# Altium PCB Connector.PcbDoc
Units mm, origin at the board's own origin, x right, y up, seen from the top; angles counter-clockwise.
Board outline 113.03 x 118.24 mm, 4 copper layers (Top Layer, Layer 1, Layer 2, Bottom Layer), stack 0.603 mm thick; 55 components, 258 nets, 298 pads, 108 vias.
Unrouted connection lines stored in the file: 2.
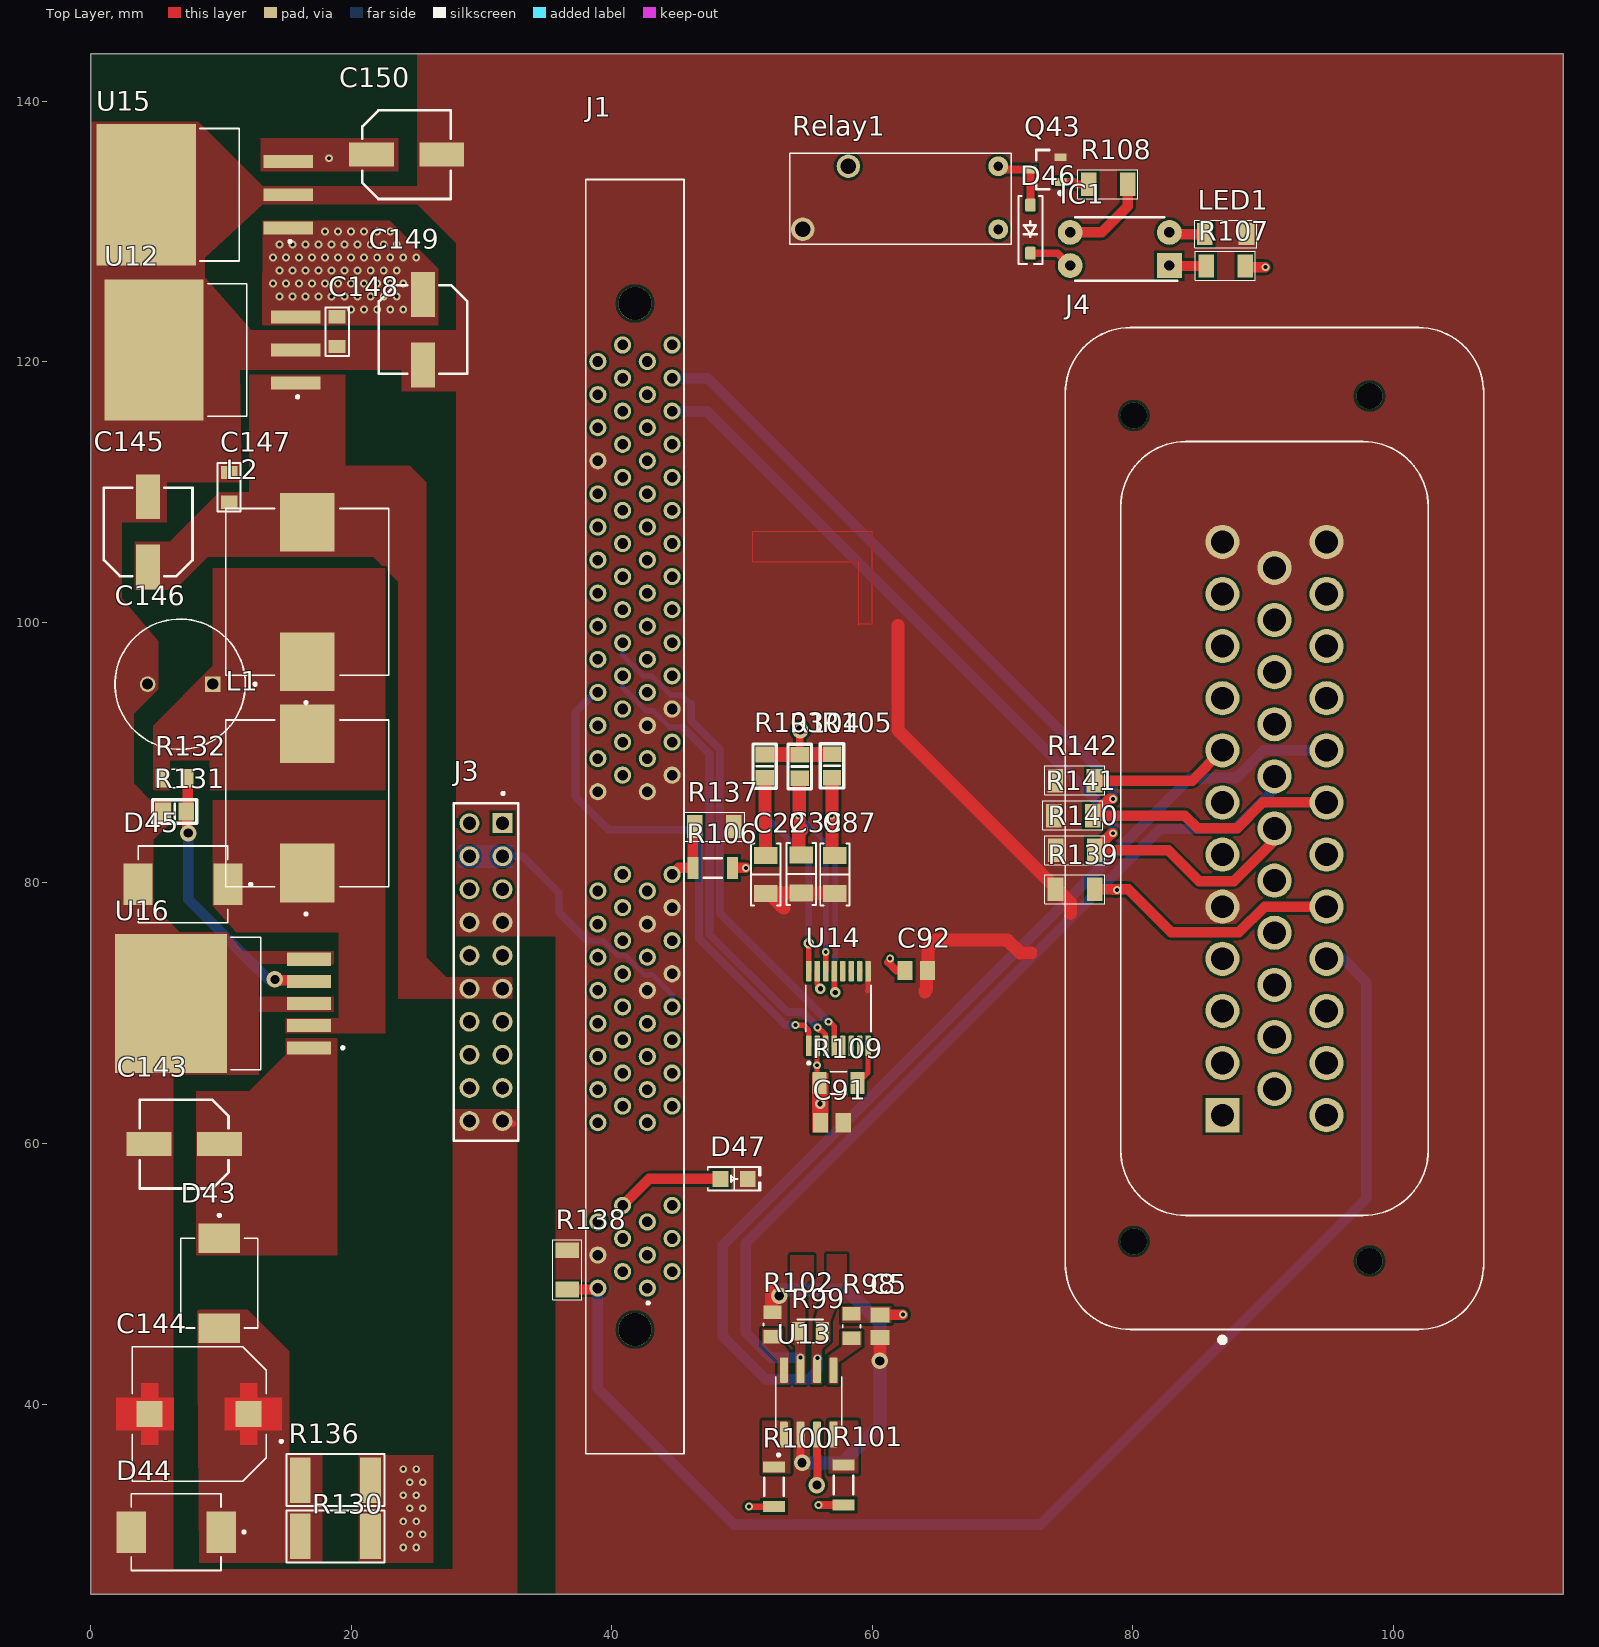
[diagram p0: Top Layer view]
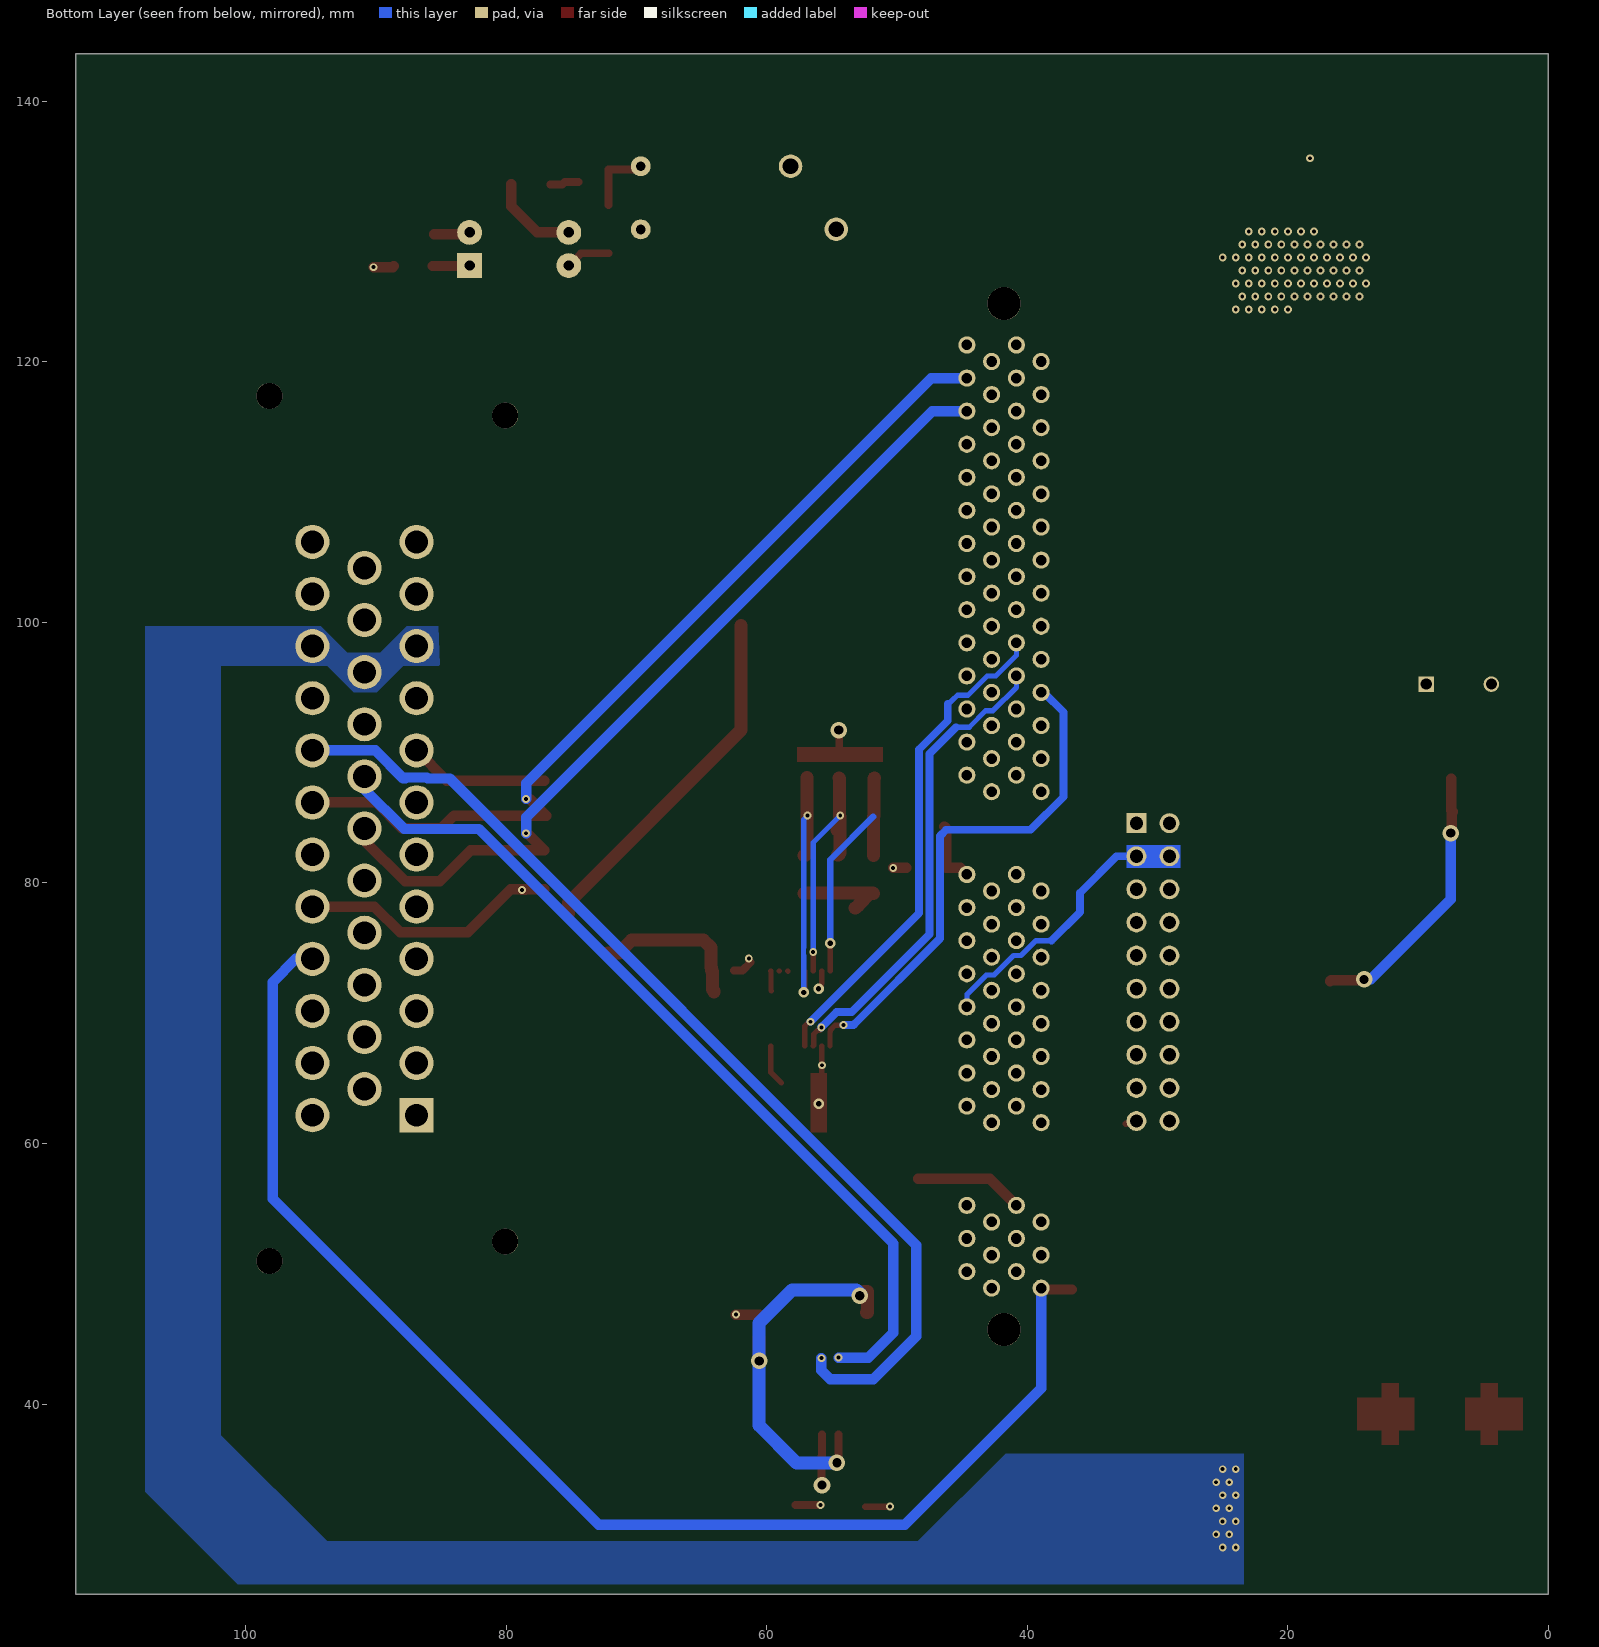
[diagram p1: Bottom Layer view, seen from below]
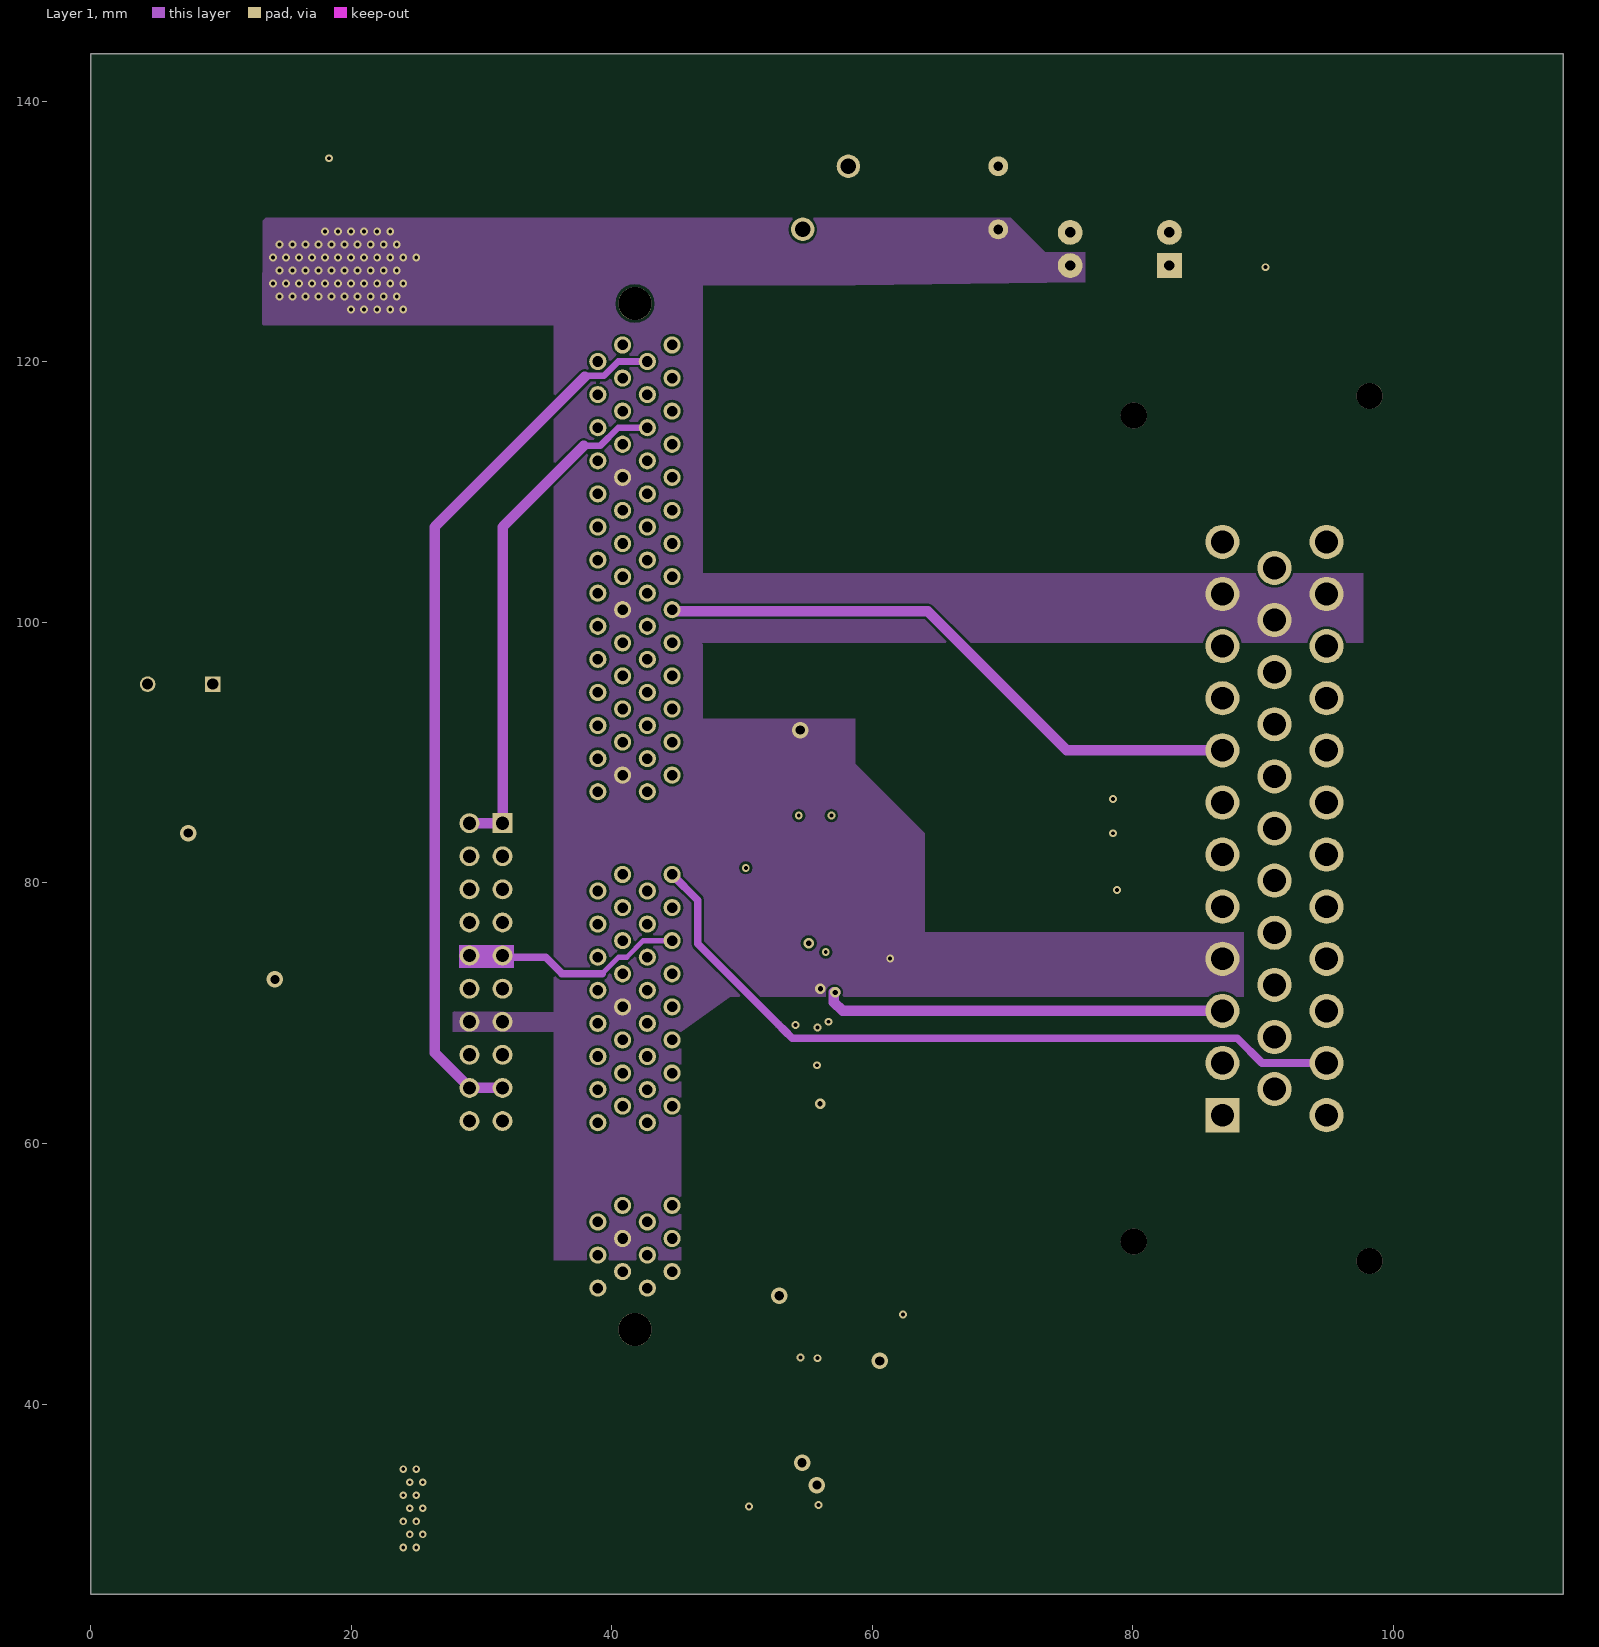
[diagram p2: Layer 1]
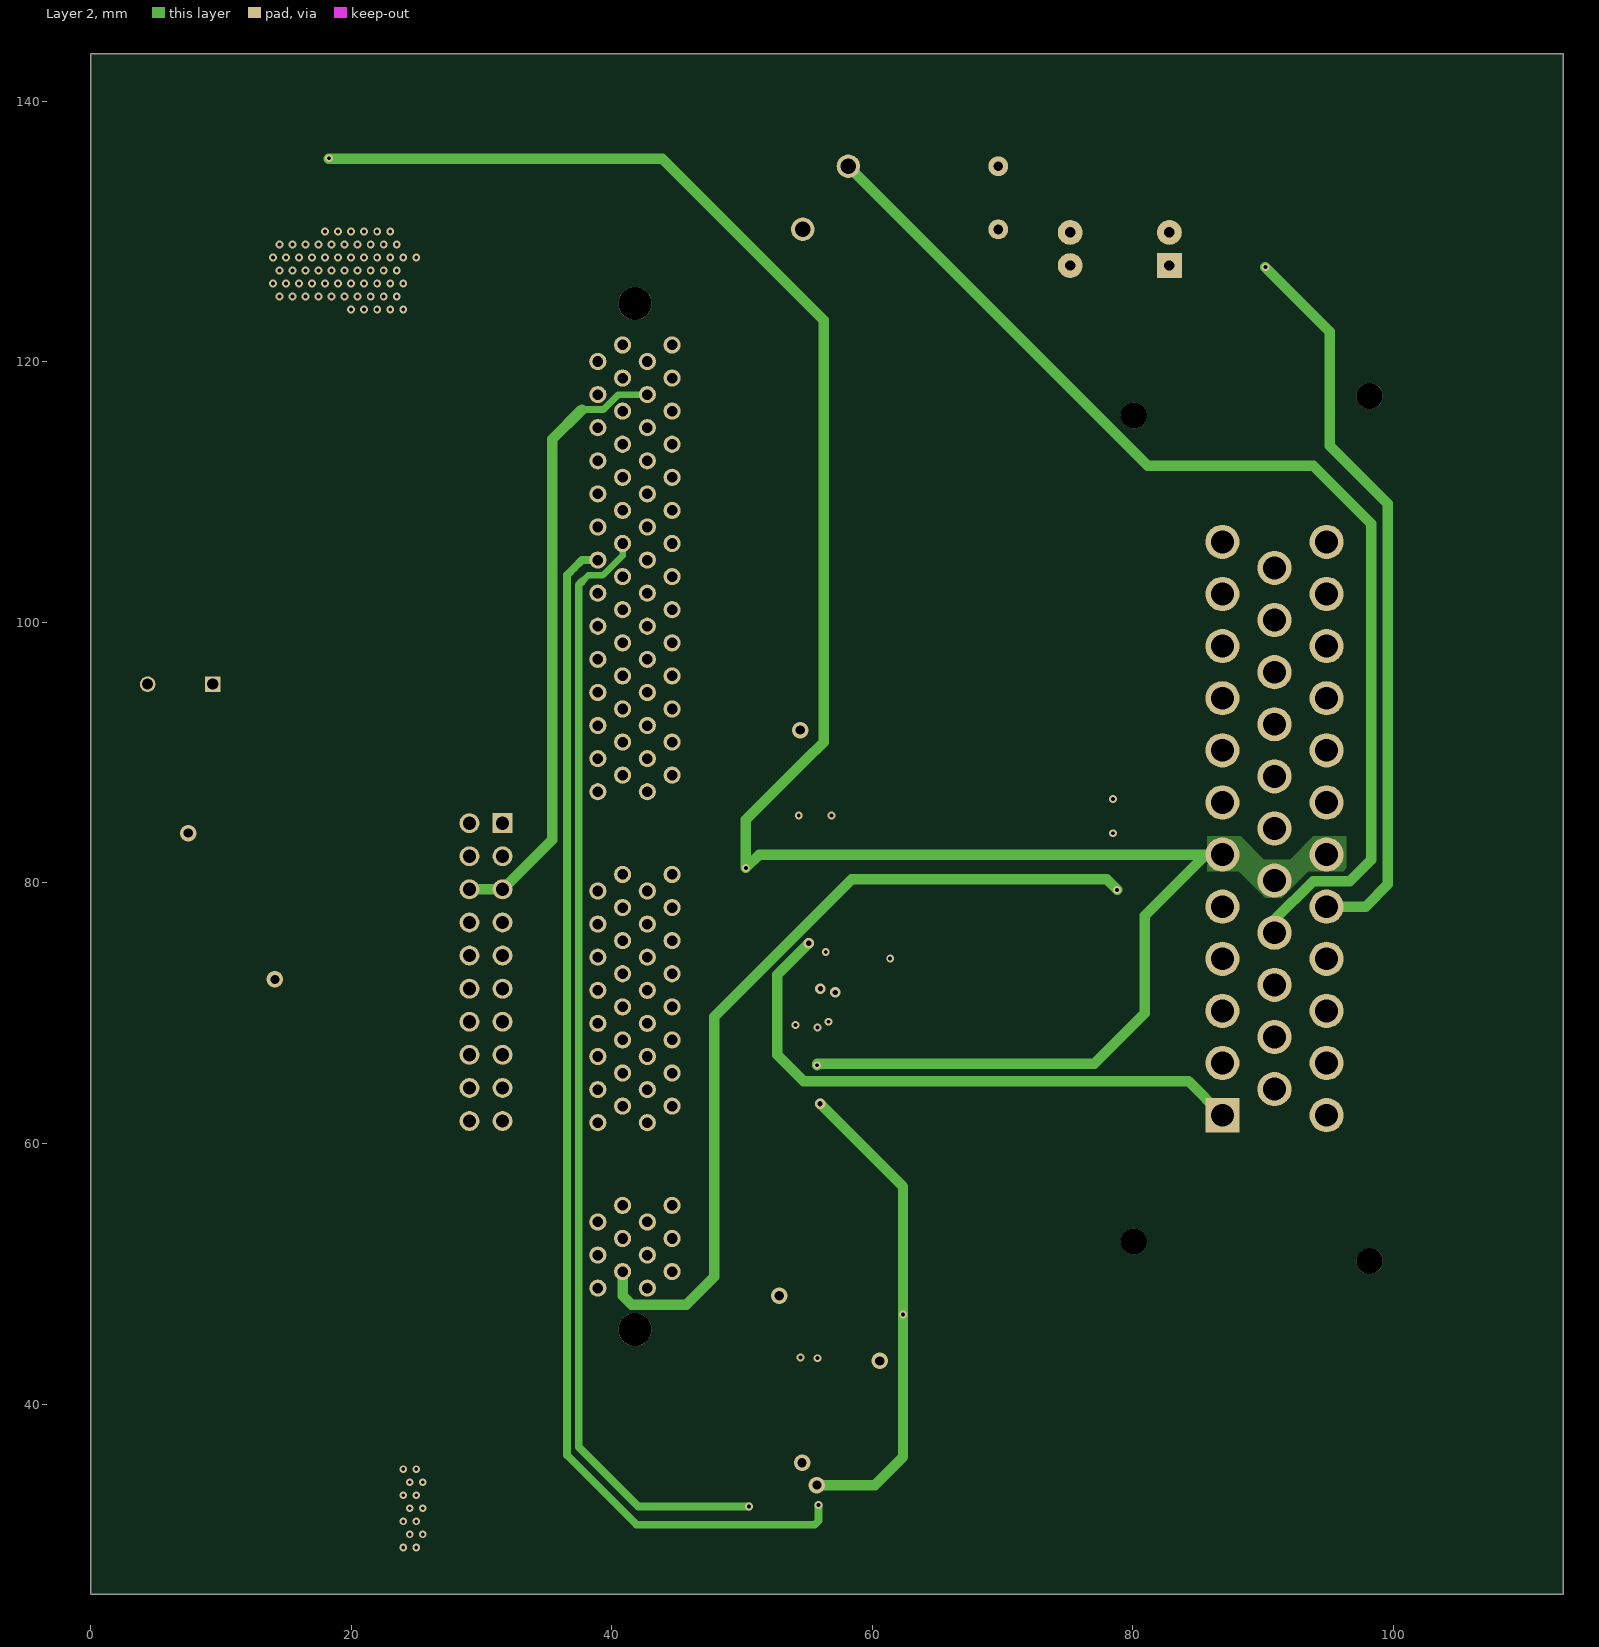
[diagram p3: Layer 2]
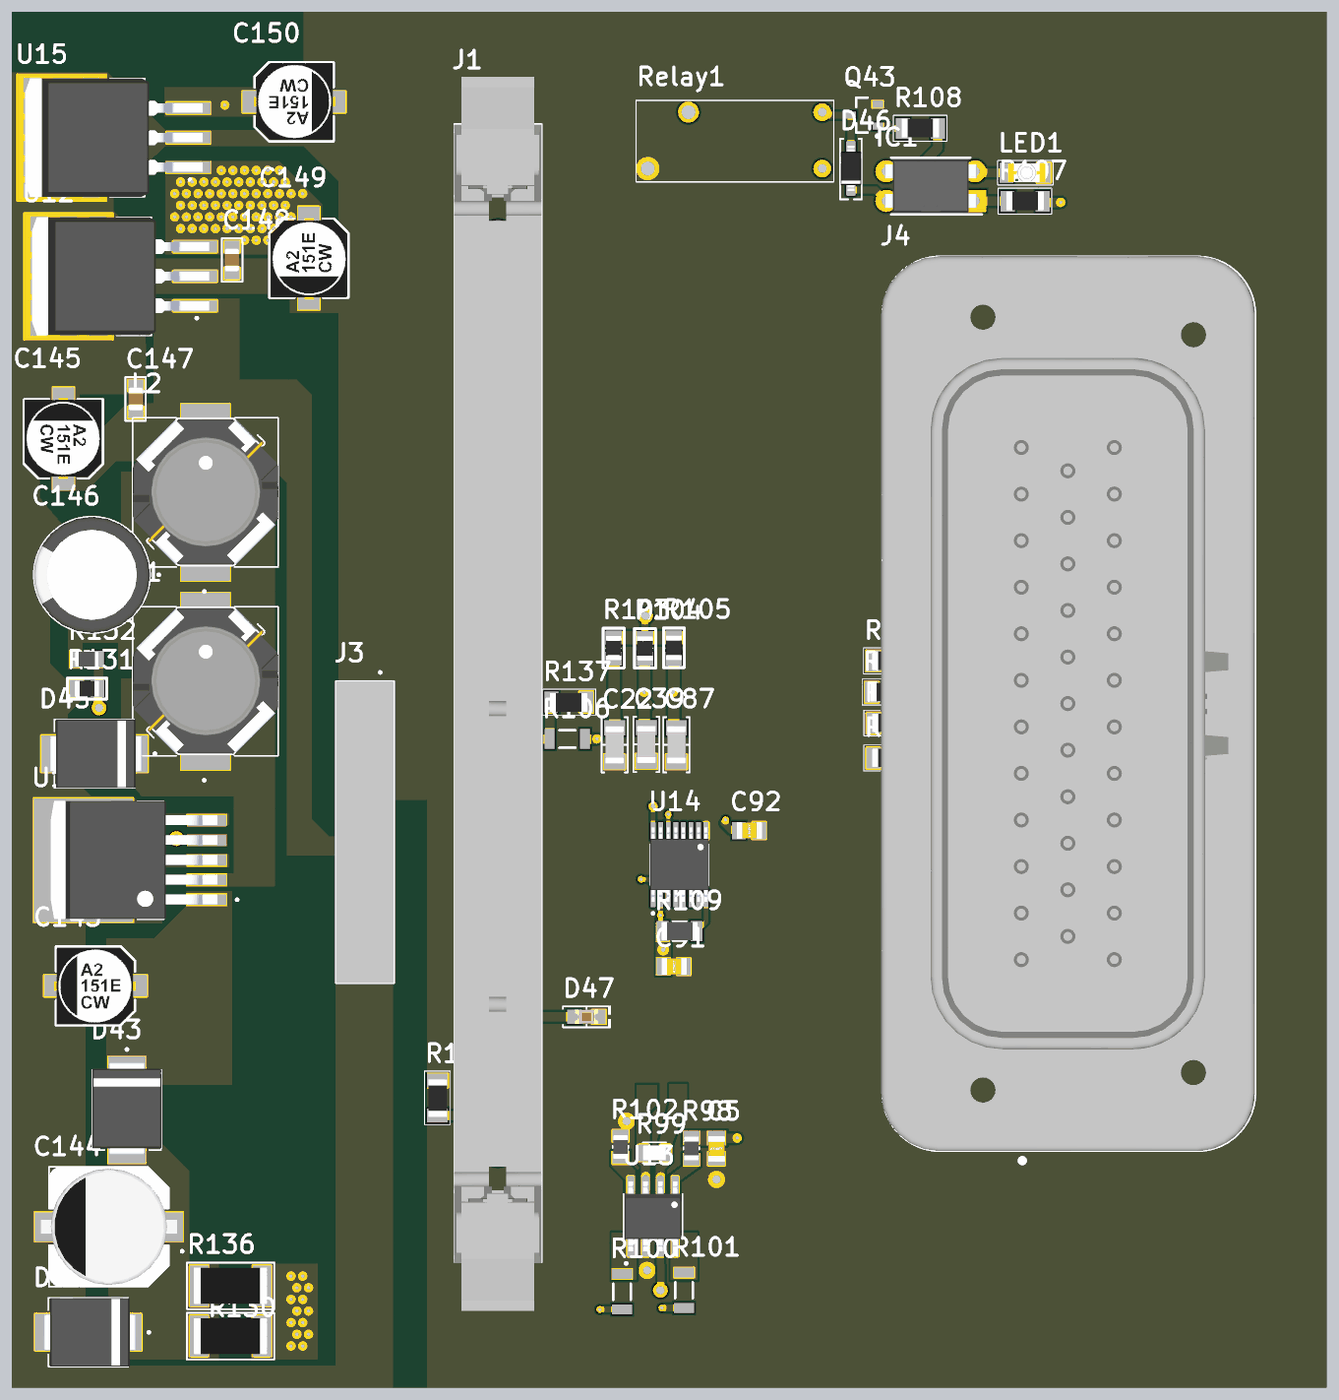
[diagram p4: 3D render of the assembled board from above, using the file's embedded part models]

## Layer stack, top to bottom
Top Solder: solder mask 0.0102, Solder Resist, Dk 3.5
Top Layer: signal copper 0.0356
Dielectric 2: prepreg 0.0711, PP-006, Dk 4.1
Layer 1: signal copper 0.035
Dielectric 1: dielectric 0.32, FR-4, Dk 4.8
Layer 2: signal copper 0.035
Dielectric 3: prepreg 0.0711, PP-006, Dk 4.1
Bottom Layer: signal copper 0.0356
Bottom Solder: solder mask 0.0102, Solder Resist, Dk 3.5

## Board outline
0,25.4 113.03,25.4 113.03,143.637 0,143.637

## Design rules (kind name [scope] priority, off if disabled: settings)
Clearance [All] p1: gap=0.2 ignorepadtopadclearanceinfootprint=FALSE except(0: Arc-Hole Track-Hole SMDPad-Hole THPad-Hole Via-Hole Fill-Hole Poly-Hole Region-Hole Text-Hole)
Height [All] p1: minheight=-1000 maxheight=25 prefheight=0
PolygonConnect [All] p1: connectstyle=Direct reliefconductorwidth=0.254 reliefentries=4 polygonreliefangle="90 Angle" airgapwidth=0.254
RoutingVias [All] p1: holewidth=0.711 width=1.27 viastyle="Through Hole" minholewidth=0.711 minwidth=1.27 maxholewidth=0.711 maxwidth=1.27
SolderMaskExpansion [All] p1: expansion=0.102 istentingtop=FALSE
Width [All] p1: maxlimit=10 minlimit=0.2 preferedwidth=0.254 minimp=50.000000 maximp=50.000000 favimp=50.000000
29 further rules are at their usual default settings.

## Components (designator, comment, footprint, x,y, rotation, side; value= is the part's Value field where it differs from the comment)
C5 "0.1uF" CAPC2012X88N 60.579,45.974 r270 top
C22 "1nF" "CAP 1206_3216 - 1.8MM" 51.816,80.645 r90 top
C39 "1nF" "CAP 1206_3216 - 1.8MM" 54.546,80.683 r90 top
C87 "1nF" "CAP 1206_3216 - 1.8MM" 57.131,80.648 r90 top
C91 "0.1uF" CAPC2012X88N 56.896,61.595 r0 top
C92 "0.1uF" CAPC2012X88N 63.373,73.279 r0 top
C143 "100uF" CapSmdElc 7.186,59.944 r180 top
C144 "330UF" CAP_EEETC1C331V 8.34,39.236 r180 top
C145 "100uF" CapSmdElc 4.425,106.934 r90 top
C146 "2000uF" CAPPRD500W60D1000H1600 6.878,95.25 r180 top
C147 "100nF" C-0805W 10.648,110.363 r270 top
C148 "100nF" C-0805W 18.923,122.301 r90 top
C149 "2.2uF" CapSmdElc 25.527,122.461 r270 top
C150 "2.2uF" CapSmdElc 24.257,135.89 r0 top
D43 "SK54" DIOM7959X265N 9.886,49.276 r270 top
D44 "SK54" DIOM7959X265N 6.57,30.174 r180 top
D45 "SK54" DIOM7959X265N 7.092,79.883 r180 top
D46 "1N4148 Diyot" SOD-123 72.136,130.175 r270 top
D47 "Red 645nm LED Indication - Discrete 1.8V 0805" "SMD: LED 0805/2012 RED" 49.403,57.277 r0 top
IC1 "EL817(C)" DIP762W60P254L458H480Q4N 78.994,128.651 r180 top
J1 "100 Position DIMM" TE_5390213-1 41.783,85.09 r90 top
J3 "20 pos. conn." SAMTEC_SSQ-110-X-X-D 30.353,73.152 r90 top
J4 "Conn Power HDR 35 POS" TE_776230-2 90.868,84.172 r90 top
L1 "220uH" IND_MDH12577C-101MA=P3 16.637,86.106 r90 top
L2 "220uH" IND_MDH12577C-101MA=P3 16.637,102.332 r90 top
LED1 "LTST-C150KGKT" L-1206 87.122,129.794 r180 top
Q43 "BC817-40,235" "SOT23 (TO-236AB)" 73.286,134.747 r180 top
R98 "10K" RESC2012X70N 58.42,45.974 r90 top
R99 "120Ω" RESC2012X65N 55.245,45.593 r180 top
R100 "0 Ω" "RES 0.0 OHM 1206" 52.451,33.655 r90 top
R101 "0 Ω" "RES 0.0 OHM 1206" 57.785,33.782 r90 top
R102 "10K" RESC2012X70N 52.324,46.101 r270 top
R103 "RES SMD 1K OHM 1% 1/8W 0805" RES_0805 51.737,88.956 r90 top
R104 "RES SMD 1K OHM 1% 1/8W 0805" RES_0805 54.431,88.935 r90 top
R105 "RES SMD 1K OHM 1% 1/8W 0805" RES_0805 56.912,88.978 r90 top
R106 "0 Ω" "RES 0.0 OHM 1206" 47.752,81.153 r180 top
R107 "100" R-1206 87.12,127.346 r0 top
R108 "510" R-1206 78.105,133.604 r0 top
R109 "2.2K" RESC3115X65N-2.2K-1206 57.404,64.643 r180 top
R130 "22Ω" R-2512R 18.796,29.845 r0 top
R131 "RES SMD 1K OHM 1% 1/8W 0805" RES_0805 6.457,85.471 r0 top
R132 "11KΩ" RESC2012X50N 6.457,88.011 r180 top
R136 "22Ω" R-2512R 18.796,34.163 r0 top
R137 "100" R-1206 47.879,84.328 r180 top
R138 "100" R-1206 36.576,50.292 r270 top
R139 "100" R-1206 75.565,79.502 r0 top
R140 "100" R-1206 75.58,82.507 r0 top
R141 "100" R-1206 75.425,85.165 r0 top
R142 "100" R-1206 75.552,87.849 r0 top
Relay1 "relay" Relay 70.666,136.017 r180 top
U12 "LM7805S/NOPB" TO254P1524X483-4N 9.348,120.904 r180 top
U13 "SN65HVD234D" SOIC127P599X175-8N 55.118,40.132 r90 top
U14 "TXB0106PWR" SOP65P640X120-16N 57.404,70.358 r90 top
U15 "LM7805S/NOPB" TO254P1524X483-4N 8.763,132.815 r180 top
U16 "LM2576S-12/NOPB" VREG_TPS79625KTTR 6.164,70.739 r180 top

## Footprints (in the part's own frame and the unit in brackets; to place one, negate y for a bottom-side part, rotate by r counter-clockwise, add the part's x,y. Pads: shape width x height; smd on the part's side, far side on the other; paste and mask are expansions set on the pad)
C-0805W [mm] "capacitor 0805 wave soldering"
  rect 1x1.3 smd: 1(-1.15,0) 2(1.15,0)
  silkscreen extent -1.88,-0.9 1.88,0.87, body extent -1,-0.63 1,0.63, height 0.78
"CAP 1206_3216 - 1.8MM" [mm] "Chip Capacitor, 2-Leads, Body 3.25x1.60mm, IPC Medium Density"
  rect 1.3x1.8 smd: 1(-1.45,0) 2(1.45,0)
  silkscreen extent -2.37,-1.12 2.37,1.12, body extent -1.6,-0.8 1.6,0.8, height 1.8
CAP_EEETC1C331V [mm]
  rect 2x2 smd paste-2 mask+0: 1(-3.8,0) 2(3.8,0)
  Top Layer region: -3.15,1.25 -1.95,1.25 -1.95,-1.25 -3.15,-1.25 -3.15,-2.35 -4.45,-2.35 -4.45,-1.25 -6.35,-1.25 -6.35,1.25 -4.45,1.25 -4.45,2.35 -3.15,2.35
  Top Layer region: 4.45,1.25 6.35,1.25 6.35,-1.25 4.45,-1.25 4.45,-2.35 3.15,-2.35 3.15,-1.25 1.95,-1.25 1.95,1.25 3.15,1.25 3.15,2.35 4.45,2.35
  silkscreen extent -6.4,-5.15 5.15,5.15, body extent -5.85,-5.15 5.85,5.15, height 10.52
CAPC2012X88N [mm]
  rect 1.16x1.47 smd: 1(-0.875,0) 2(0.875,0)
  body extent -1.06,-0.72 1.14,0.73, height 1
CAPPRD500W60D1000H1600 [mm]
  round 1.2 hole 0.85: N(2.5,0)
  rect 1.2x1.2 hole 0.85: P(-2.5,0)
  silkscreen extent -5.85,-5 5,5, body extent -5,-5 5,5, height 16
CapSmdElc [mm] "Aluminum Electrolytic Capacitor, Body 6.70x6.70x6.30mm, IPC Low Density"
  rect 3.45x1.85 smd: 1(-2.7,0) 2(2.7,0)
  silkscreen extent -3.4,-3.4 3.4,3.4, body extent -3.45,-3.27 3.55,3.32, height 6.92
DIOM7959X265N [mm]
  rect 2.25x3.18 smd: A(3.455,0) C(-3.455,0)
  silkscreen extent -5.3,-2.95 3.44,2.95, body extent -4.1,-2.95 3.84,2.95, height 2.62
DIP762W60P254L458H480Q4N [mm]
  rect 1.9x1.9 hole 0.8: 1(-3.81,1.27)
  round 1.9 hole 0.8: 2(-3.81,-1.27) 3(3.81,-1.27) 4(3.81,1.27)
  silkscreen extent -4.41,-2.44 3.4,2.44, body extent -3.96,-2.29 3.96,2.29, height 4.8
IND_MDH12577C-101MA=P3 [mm]
  rect 4.5x4.2 smd: 1(-5.35,0) 2(5.35,0)
  silkscreen extent -8.6,-6.25 6.4,6.25, body extent -6.36,-6.28 6.44,6.22, height 8
L-1206 [mm]
  rect 1.2x1.7 smd: 1(-1.6,0) 2(1.6,0)
  silkscreen extent -2.4,-1.05 2.37,1.05, body extent -1.73,-0.8 1.48,0.8, height 1.11
R-1206 [mm]
  rect 1.2x1.8 smd: 1(-1.5,0) 2(1.5,0)
  silkscreen extent -2.32,-1.1 2.27,1.12, body extent -1.6,-0.78 1.6,0.83, height 0.56
R-2512R [mm] "resistor 2512 reflow soldering"
  rect 1.6x3.5 smd: 1(-2.7,0) 2(2.7,0)
  silkscreen extent -3.75,-2 3.75,2, body extent -3.15,-1.55 3.15,1.55, height 0.55
Relay [mm]
  round 1.524 hole 0.762: 1(1,5.86) 2(1,1.016)
  round 1.8 hole 1.2: 3(12.5,1.016) 4(16,5.86)
  silkscreen extent 0,0 17,7
"RES 0.0 OHM 1206" [mm]
  rect 0.85x1.7 smd: 1(-1.525,0) 2(1.525,0)
  silkscreen extent -0.7,-0.75 0.7,0.75, body extent -1.6,-0.85 1.6,0.85, height 0.65
RES_0805 [mm]
  rect 1.2x1.4 smd: 1(-0.9,0) 2(0.9,0)
  silkscreen extent -1.7,-0.9 1.7,0.9, body extent -1.05,-0.68 1.05,0.68, height 0.6
RESC2012X50N [mm]
  rect 0.92x1.42 smd: 1(-1,0) 2(1,0)
  silkscreen extent -0.22,-0.7 0.22,0.7, body extent -0.99,-0.62 1.01,0.63, height 0.5
RESC2012X65N [mm]
  rrect25% 1x1.42 smd: 1(-0.935,0) 2(0.935,0)
  silkscreen extent -1,-0.89 1,0.89, body extent -1,-0.62 1,0.62, height 0.6
RESC2012X70N [mm]
  rect 1.04x1.38 smd: 1(-0.94,0) 2(0.94,0)
  silkscreen extent -0.1,-0.68 0.1,0.68, body extent -1,-0.62 1,0.63, height 0.7
RESC3115X65N-2.2K-1206 [mm]
  rect 1.05x1.72 smd: 1(-1.46,0) 2(1.46,0)
  silkscreen extent -0.62,-0.85 0.62,0.85, body extent -1.55,-0.77 1.55,0.78, height 0.65
SAMTEC_SSQ-110-X-X-D [mm]
  rect 1.53x1.53 hole 1.02: 01(11.43,-1.27)
  round 1.53 hole 1.02: 02(11.43,1.27) 03(8.89,-1.27) 04(8.89,1.27) 05(6.35,-1.27) 06(6.35,1.27) 07(3.81,-1.27) 08(3.81,1.27) 09(1.27,-1.27) 10(1.27,1.27) 11(-1.27,-1.27) 12(-1.27,1.27) 13(-3.81,-1.27) 14(-3.81,1.27) 15(-6.35,-1.27) 16(-6.35,1.27) 17(-8.89,-1.27) 18(-8.89,1.27) 19(-11.43,-1.27) 20(-11.43,1.27)
  silkscreen extent -12.96,-2.47 13.81,2.47, body extent -12.95,-2.48 12.95,2.48, height 8.51
"SMD: LED 0805/2012 RED" [mm] "Chip Diode, 2-Leads, Body 2.00x1.25mm, IPC Medium Density"
  rect 1.2x1.2 smd: 1(-1.05,0) 2(1.05,0)
  silkscreen extent -2.03,-0.9 2.03,0.9, body extent -1,-0.62 1,0.63, height 0.9
SOD-123 [mm] "SOD, 2-Leads, Body 1.55x3.70mm, IPC Medium Density"
  rrect25% 1x0.8 smd: 1(-1.85,0) 2(1.85,0)
  silkscreen extent -2.54,-0.92 2.67,0.92, body extent -1.95,-0.9 1.95,0.9, height 1.18
SOIC127P599X175-8N [mm]
  rrect25% 1.97x0.6 smd: 1(-2.47,1.905) 2(-2.47,0.635) 3(-2.47,-0.635) 4(-2.47,-1.905) 5(2.47,-1.905) 6(2.47,-0.635) 7(2.47,0.635) 8(2.47,1.905)
  silkscreen extent -4.14,-2.52 1.95,2.52, body extent -3,-2.45 3,2.45, height 1.75
SOP65P640X120-16N [mm]
  rrect25% 1.57x0.41 smd: 1(-2.87,2.275) 2(-2.87,1.625) 3(-2.87,0.975) 4(-2.87,0.325) 5(-2.87,-0.325) 6(-2.87,-0.975) 7(-2.87,-1.625) 8(-2.87,-2.275) 9(2.87,-2.275) 10(2.87,-1.625) 11(2.87,-0.975) 12(2.87,-0.325) 13(2.87,0.325) 14(2.87,0.975) 15(2.87,1.625) 16(2.87,2.275)
  silkscreen extent -4.29,-2.5 1.77,2.5, body extent -3.2,-2.5 3.2,2.5, height 1.2
"SOT23 (TO-236AB)" [mm] "SOT23, 3-Leads, Body 2,90x2,30mm, Pitch 0,95mm, IPC Medium Density"
  rect 0.9x0.6 smd: 1(-1.15,0.95) 2(-1.15,-0.95) 3(1.15,0)
  silkscreen extent -1.28,-1.5 0.7,1.92, body extent -0.7,-1.5 0.7,1.5, height 1.1
TE_776230-2 [mm]
  rect 2.625x2.625 hole 1.75: 1(-22,4)
  round 2.625 hole 1.75: 2(-18,4) 3(-14,4) 4(-10,4) 5(-6,4) 6(-2,4) 7(2,4) 8(6,4) 9(10,4) 10(14,4) 11(18,4) 12(22,4) 13(-20,0) 14(-16,0) 15(-12,0) 16(-8,0) 17(-4,0) 18(0,0) 19(4,0) 20(8,0) 21(12,0) 22(16,0) 23(20,0) 24(-22,-4) 25(-18,-4) 26(-14,-4) 27(-10,-4) 28(-6,-4) 29(-2,-4) 30(2,-4) 31(6,-4) 32(10,-4) 33(14,-4) 34(18,-4) 35(22,-4)
  round 2 hole 2 unplated: ""(-33.2,-7.3) ""(-31.7,10.8) ""(31.7,10.8) ""(33.2,-7.3)
  silkscreen extent -39.45,-16.05 38.45,16.05, body extent -38.43,-15.96 38.47,16.14, height 30.48
TE_5390213-1 [mm]
  round 1.318 hole 0.81: 1(-36.195,-0.95) 2(-34.925,-2.85) 3(-33.655,-0.95) 4(-32.385,-2.85) 5(-31.115,-0.95) 6(-29.845,-2.85) 7(-23.495,-0.95) 8(-22.225,-2.85) 9(-20.955,-0.95) 10(-19.685,-2.85) 11(-18.415,-0.95) 12(-17.145,-2.85) 13(-15.875,-0.95) 14(-14.605,-2.85) 15(-13.335,-0.95) 16(-12.065,-2.85) 17(-10.795,-0.95) 18(-9.525,-2.85) 19(-8.255,-0.95) 20(-6.985,-2.85) 21(-5.715,-0.95) 22(-4.445,-2.85) 23(1.905,-0.95) 24(3.175,-2.85) 25(4.445,-0.95) 26(5.715,-2.85) 27(6.985,-0.95) 28(8.255,-2.85) 29(9.525,-0.95) 30(10.795,-2.85) 31(12.065,-0.95) 32(13.335,-2.85) 33(14.605,-0.95) 34(15.875,-2.85) 35(17.145,-0.95) 36(18.415,-2.85) 37(19.685,-0.95) 38(20.955,-2.85) 39(22.225,-0.95) 40(23.495,-2.85) 41(24.765,-0.95) 42(26.035,-2.85) 43(27.305,-0.95) 44(28.575,-2.85) 45(29.845,-0.95) 46(31.115,-2.85) 47(32.385,-0.95) 48(33.655,-2.85) 49(34.925,-0.95) 50(36.195,-2.85) 51(-36.195,2.85) 52(-34.925,0.95) 53(-33.655,2.85) 54(-32.385,0.95) 55(-31.115,2.85) 56(-29.845,0.95) 57(-23.495,2.85) 58(-22.225,0.95) 59(-20.955,2.85) 60(-19.685,0.95) 61(-18.415,2.85) 62(-17.145,0.95) 63(-15.875,2.85) 64(-14.605,0.95) 65(-13.335,2.85) 66(-12.065,0.95) 67(-10.795,2.85) 68(-9.525,0.95) 69(-8.255,2.85) 70(-6.985,0.95) 71(-5.715,2.85) 72(-4.445,0.95) 73(1.905,2.85) 74(3.175,0.95) 75(4.445,2.85) 76(5.715,0.95) 77(6.985,2.85) 78(8.255,0.95) 79(9.525,2.85) 80(10.795,0.95) 81(12.065,2.85) 82(13.335,0.95) 83(14.605,2.85) 84(15.875,0.95) 85(17.145,2.85) 86(18.415,0.95) 87(19.685,2.85) 88(20.955,0.95) 89(22.225,2.85) 90(23.495,0.95) 91(24.765,2.85) 92(26.035,0.95) 93(27.305,2.85) 94(28.575,0.95) 95(29.845,2.85) 96(31.115,0.95) 97(32.385,2.85) 98(33.655,0.95) 99(34.925,2.85) 100(36.195,0.95)
  round 2.54 hole 2.54 unplated: ""(-39.37,0) ""(39.37,0)
  silkscreen extent -48.89,-3.77 48.89,3.77, body extent -53.06,-3.75 52.94,3.79, height 23.37
TO254P1524X483-4N [mm]
  rect 3.79x0.99 smd: 1(-6.4,2.54) 2(-6.4,0) 3(-6.4,-2.54)
  rect 7.62x10.84 smd paste-6: 4(4.48,0)
  silkscreen extent -6.65,-5.08 0.36,5.08, body extent -7.62,-5.08 7.62,5.08, height 5.08
VREG_TPS79625KTTR [mm]
  rect 3.4x1 smd paste-3 mask+0: 1(-10.6,3.4) 2(-10.6,1.7) 3(-10.6,0) 4(-10.6,-1.7) 5(-10.6,-3.4)
  rect 8.6x10.7 smd paste-6 mask+0: 6(0,0)
  silkscreen extent -13.3,-5.08 -4.62,5.08, body extent -11.52,-5.1 2.83,5.06, height 4.78

## Part data
C5 C91 C92: library part "CAP 0.1uF SMD 0805", "Cap Ceramic 0.1uF 35V X7R 10% SMD 0805 125Â°C Paper T/R", Package="0805 KEMET", Availability=Unavailable, MF=KEMET, MP=C0805C104K6RACTU, Price=None, SnapEDA_Link=https://www.snapeda.com/parts/C0805C104K6RACTU/KEMET/view-part/2037626/?ref=snap
C22 C39 C87: library part "CAP 1nF 1206"
C143 C145: library part "100 uF Electr Cap"
C144: library part "CAP 330UF SMD", "CAP ALUM 330UF 20% 16V SMD", Package="RADIAL-2 Panasonic", Availability="In Stock", Check_prices=https://www.snapeda.com/parts/EEE-TC1C331V/Panasonic/view-part/6178283/?ref=eda, MF="Panasonic Electronic Components", MP=EEE-TC1C331V, Price=None, Purchase-URL=https://pricing.snapeda.com/search/part/EEE-TC1C331V/?ref=eda, SnapEDA_Link=https://www.snapeda.com/parts/EEE-TC1C331V/Panasonic/view-part/6178283/?ref=snap
C146: "CAP ALUM 2000UF 20% 6.3V RADIAL - Electrolytic", Package="RADIAL-2 Panasonic", Availability="No availability data", Check_prices=https://www.snapeda.com/parts/EEUFS0J202/Panasonic/view-part/5797032/?ref=eda, MF=Panasonic, MP=EEUFS0J202, Price=None, SnapEDA_Link=https://www.snapeda.com/parts/EEUFS0J202/Panasonic/view-part/5797032/?ref=snap
C147 C148: library part "CAP 100nF 50V SMT 0805", "WCAP-CSGP General Purpose MLCC; SMT 0805; X7R; 100nF 10%; 50V; -55C to +125C; Tech. PN X7R0805104K050DFCT10000", Package="0805 Wurth Electronics", Availability=Warning, BuyPart=https://www.snapeda.com/parts/885012207098/Wurth%20Electronics%20Inc/view-part/4217223/?ref=eda, DigiKey-Purchase-URL=https://snapeda.com/shop?store=DigiKey&id=4217223, MF="Wurth Electronics Inc", Mouser-Purchase-URL=https://snapeda.com/shop?store=Mouser&id=4217223, MP=885012207098, Price=None, SnapEDA_Link=https://www.snapeda.com/parts/885012207098/Wurth%20Electronics%20Inc/view-part/4217223/?ref=snap
C149 C150: library part "CAP 2.2uF", "Electrolytic Capacitor"
D43 D44 D45: "Diode Schottky 40V 5A Surface Mount DO-214AA (SMB)", Package="DO-214 ON Semiconductor", Arrow_Electronics-Purchase-URL=https://snapeda.com/shop?store=Arrow+Electronics&id=432205, Availability=Good, DigiKey-Purchase-URL=https://snapeda.com/shop?store=DigiKey&id=432205, MF="ON Semiconductor", Mouser-Purchase-URL=https://snapeda.com/shop?store=Mouser&id=432205, MP=MBRS320T3G, Price=None, SnapEDA_Link=https://www.snapeda.com/parts/MBRS320T3G/ON%20Semiconductor/view-part/432205/?ref=snap
D46: library part 1N4148, "DIODE GEN PURP 100V 150MA SOD123", +Sicaklik=+150, -Sicaklik=-65, Cins=Diyot, Deger=1N4148, Kılıf=SOD123, Lehim Yöntemi=SMD, MSL="1 (Unlimited)", Uretici Kodu=1N4148W-TP
D47: library part LED_Kırmızı, "LED RED DIFFUSED 0805 SMD", +Sicaklik=+125, -Sicaklik=-40, Cins=LED, Deger="KIRMIZI LED", Kılıf=0805, Lehim Yöntemi=SMD, MSL="1 (Unlimited)", Uretici Kodu="LH R974-LP-1"
IC1: "IC-817 OPTOC.TRANS.OUTPUT DIP4", Manufacturer=SHARP, Özdisan Part Number=PC817B=PC817X2NSZW, Link=https://www.ozdisan.com/optolar-sensorler/optolar/transistor-cikisli-optokuplorler/PC817BPC817X2NSZW, Price=0,12190+KDV
J1: "100 Position DIMM DRAM Socket Through Hole", Package=None, Availability=Unavailable, Centerline_Pitch="1.27 mm[.05 in]", EU_RoHS_Compliance=Compliant, MF="TE Connectivity", MP=5390213-1, Number_of_Positions=100, Price=None, Product_Type=Socket, SnapEDA_Link=https://www.snapeda.com/parts/5390213-1/TE%20Connectivity%20AMP%20Connectors/view-part/781316/?ref=snap, TE_purchase_URL=https://www.te.com/usa-en/product-5390213-1.html?te_bu=Cor&te_type=disp&te_campaign=seda_glo_cor-seda-global-disp-prtnr-fy19-seda-model-bom-cta_sma-317_1&elqCampaignId=32493
J3: "SSQ - Samtec 2.54mm Square Tail Dual Row Socket Strip 8.5mm Profile - Fast Stock", Package=None, Availability=Bad, Check_prices=https://www.snapeda.com/parts/SSQ-110-23-G-D/Samtec/view-part/3247245/?ref=eda, MF=Samtec, MP=SSQ-110-23-G-D, Price=None, Purchase-URL=https://pricing.snapeda.com/search/part/SSQ-110-23-G-D/?ref=eda, SnapEDA_Link=https://www.snapeda.com/parts/SSQ-110-23-G-D/Samtec/view-part/3247245/?ref=snap
J4: "Conn Power HDR 35 POS 4mm Solder ST Thru-Hole 35 Terminal 1 Port Automotive Loose", Package=None, Availability=Unavailable, DigiKey-Purchase-URL=https://snapeda.com/shop?store=DigiKey&id=1466385, EU_RoHS_Compliance=Compliant, MF="TE Connectivity", MP=776230-2, Price=None, SnapEDA_Link=https://www.snapeda.com/parts/776230-2/TE%20Connectivity%20AMP%20Connectors/view-part/1466385/?ref=snap
L1 L2: library part "220uH Inductor SMD", "Inductor Power Shielded Wirewound 220uH 20% 100KHz Ferrite 1.1A 0.325Ohm DCR 5049 Automotive T/R", Package=None, Availability=Unavailable, MP=MDH12577C-101MA=P3, Price=None
LED1: "LED SMD 1206 GREEN WATER CLEAR 18~71 mcd", Manufacturer=LITEON, Link=https://www.ozdisan.com/led-led-aydinlatma-cozumleri/led-komponentler/renkli-led-sinyal/LTST-C150KGKT, Price=0,07332+KDV, Özdisan Part Number=LTST-C150KGKT
Q43: "TRANSISTOR DIS.500mA 45V NPN SOT23 GEN. SMT", Manufacturer="NXP (PHILIPS)", Link=https://www.ozdisan.com/guc-yari-iletkenleri/transistor/discrete-transistorler/BC817-40235, Price=0,01964+KDV, Özdisan Part Number=BC817-40,235
R98 R102: library part "RES 10K 0805", "Precision Thick Film Surface Mnt Resistor 0805 10kOhm +/-0.5% 0.1W +/-50ppm/degC", Package="2012 Panasonic Electronic Components", Availability=Unavailable, MF=Panasonic, MP=ERJ6RBD1002V, Price=None, SnapEDA_Link=https://www.snapeda.com/parts/ERJ6RBD1002V/Panasonic/view-part/946355/?ref=snap
R99: library part "RES 120Ω 0805", "RESISTOR, THICK FILM, 120R, 5%, 0805", Package=None, Availability=Unavailable, MP=CRGS0805J120R, Price=None
R100 R101 R106: library part "RES 0.0 Ω 1206"
R103 R104 R105 R131: library part "1K 0805", "1 kOhms ±1% 0.125W, 1/8W Chip Resistor 0805 (2012 Metric) Moisture Resistant Thick Film", +Sicaklik=+155, -Sicaklik=-55, Cins=Direnc, Deger=1K, Kılıf=0805, Lehim Yöntemi=SMD, MSL="1 (Unlimited)", Uretici Kodu=RC0805FR-071KL
R107 R137 R138 R139 R140 R141 R142: library part R-1206, "RES.(3216) 1206 100 Ohms 5% 1/4W 100PPM", Manufacturer=SAMSUNG, Özdisan Part Number=RC3216J101CS, Link=https://www.ozdisan.com/pasif-komponentler/direncler/smt-smd-direncler/RC3216J101CS, Price=0.00910+KDV
R108: library part R-1206, "RES.(3216) 1206 510 Ohms 1% 1/4W-S 100PPM", Manufacturer=ROYALOHM, Özdisan Part Number=1206S4F5100T5E, Link=https://www.ozdisan.com/pasif-komponentler/direncler/smt-smd-direncler/1206S4F5100T5E, Price=0,00442+KDV
R109: library part "RES 2.2K 1206", "RES SMD 2.2K OHM 1% 1/4W 1206", Package=None, Availability=Unavailable, MP=CRG1206F2K2/10, Price=None
R130 R136: library part "RES 22Ω 2512"
R132: library part "RES 11KΩ SMD", "THICK FILM RESISTOR, 11KOHM, 125mW, 5%", Package=None, Availability=Unavailable, MP=CRCW080511K0JNEA, Price=None
Relay1: "RELAY 3A 5VDC 1a PANASONIC", Manufacturer="PANASONIC COMP.", Özdisan Part Number=ALJ105W, Link=https://www.ozdisan.com/elektromekanik-komponentler/role-role-soketleri/genel-tip-roleler/ALJ105W, Price=0.48151+KDV
U12 U15: "1.5-A, 30-V, linear voltage regulator 3-DDPAK/TO-263 0 to 125", Package="TO-263-3 Texas Instruments", Availability=Warning, DigiKey-Purchase-URL=https://snapeda.com/shop?store=DigiKey&id=546227, MF="Texas Instruments", MP=LM7805S/NOPB, Price=None, SnapEDA_Link=https://www.snapeda.com/parts/LM7805S/NOPB/Texas%20Instruments/view-part/546227/?ref=snap, Texas_Instruments-Purchase-URL=https://snapeda.com/shop?store=Texas+Instruments&id=546227
U13: "3.3 V CAN Transceiver with Sleep Mode 8-SOIC -40 to 125", Package="SOIC-8 Texas Instruments", Availability=Good, Check_prices=https://www.snapeda.com/parts/SN65HVD234D/Texas%20Instruments/view-part/75912/?ref=eda, DigiKey-Purchase-URL=https://snapeda.com/shop?store=DigiKey&id=75912, MF="Texas Instruments", Mouser-Purchase-URL=https://snapeda.com/shop?store=Mouser&id=75912, MP=SN65HVD234D, Price=None, SnapEDA_Link=https://www.snapeda.com/parts/SN65HVD234D/Texas%20Instruments/view-part/75912/?ref=snap, Texas_Instruments-Purchase-URL=https://snapeda.com/shop?store=Texas+Instruments&id=75912
U14: "6-Bit Bidirectional Voltage-Level Translator with Auto Direction Sensing and +/-15-kV ESD Protect 16-TSSOP -40 to 85", Package="TSSOP-16 Texas Instruments", Availability=Warning, BuyPart=https://www.snapeda.com/parts/TXB0106PWR/Texas%20Instruments/view-part/134340/?ref=eda, DigiKey-Purchase-URL=https://snapeda.com/shop?store=DigiKey&id=134340, MF="Texas Instruments", Mouser-Purchase-URL=https://snapeda.com/shop?store=Mouser&id=134340, MP=TXB0106PWR, Price=None, SnapEDA_Link=https://www.snapeda.com/parts/TXB0106PWR/Texas%20Instruments/view-part/134340/?ref=snap, Texas_Instruments-Purchase-URL=https://snapeda.com/shop?store=Texas+Instruments&id=134340
U16: "SIMPLE SWITCHER&reg; 40V, 3A Low Component Count Step-Down Regulator 5-DDPAK/TO-263 -40 to 125", Package="TO-263-5 Texas Instruments", Availability=Warning, BuyPart=https://www.snapeda.com/parts/LM2576S-12/NOPB/Texas%20Instruments/view-part/470772/?ref=eda, DigiKey-Purchase-URL=https://snapeda.com/shop?store=DigiKey&id=470772, MF="Texas Instruments", Mouser-Purchase-URL=https://snapeda.com/shop?store=Mouser&id=470772, MP=LM2576S-12/NOPB, Price=None, SnapEDA_Link=https://www.snapeda.com/parts/LM2576S-12/NOPB/Texas%20Instruments/view-part/470772/?ref=snap, Texas_Instruments-Purchase-URL=https://snapeda.com/shop?store=Texas+Instruments&id=470772

## Via types
v1: diameter 0.6, hole 0.3, Top Layer to Bottom Layer, 97 vias
v2: diameter 1.27, hole 0.711, Top Layer to Bottom Layer, 7 vias
v3: diameter 0.8, hole 0.4, Top Layer to Bottom Layer, 4 vias

## Nets (pads, with @x,y where several pads share a name; then routed paths per layer and width w, separated by ;. In a path a pad name is that pad's centre, name@x,y a point inside that pad or via, vN(x,y) a via of type N, cw(c..) or ccw(c..) an arc to the next point about the centre after c; other vN are vias at no path point)
5V: 
15V: C145.1 C147.2 J3.11 J3.12 L2.2 U12.1
+3V3: C5.1 C91.1 C150.1 J4.6 J4.17 J4.29 R98.2 R106.1 R109.2 U13.3 U14.2 U15.3 | length 211.8
  Top Layer w0.4: v1(55.754,66.002) v1@55.766,66.002 ; R109.2@55.766,65.281 v1@55.766,66.002 ; U14.2 55.779,66.908 55.766,66.895 v1@55.766,66.002
  Top Layer w0.6: v2(55.753,33.782) 55.799,33.828 55.799,35.985 55.753,36.032 U13.3
  Top Layer w0.8: R106.1 v1(50.292,81.153) ; C5.1 62.343,46.849 v1(62.357,46.863)
  Layer 2 w0.8: v1@18.274,135.576 43.875,135.576 56.261,123.19 56.261,90.805 54.864,89.408 50.292,84.836 v1(50.292,81.153) 51.311,82.172 J4.6@85.601,82.172 ; v2(55.753,33.782) 60.198,33.782 62.357,35.941 v1(62.357,46.863) 62.357,56.685 v3(55.996,63.046) ; v1(55.754,66.002) 55.754,66.103 77.025,66.103 80.899,69.977 80.899,77.47 J4.6@85.601,82.172 ; J4.6 J4.6@85.601,82.172
  other v1: 18.303,135.614
+48V: J4.10 J4.21 J4.33 R130.2 R136.2
  other v1: 24,29 25,29 24.5,30 25.5,30 24,31 25,31 24.5,32 25.5,32 24,33 25,33 24.5,34 25.5,34 24,35 25,35
A: C22.2 J4.1 R103.1 U14.16 | length 64.9
  Top Layer w0.4: v3(55.126,75.368) 55.126,73.231 U14.16
  Top Layer w1: R103.1 51.776,88.017 51.776,85.13 51.816,85.09 C22.2
  Layer 2 w0.8: v3(55.126,75.368) 52.705,72.948 52.705,69.853 52.694,69.842 52.694,69.096 52.705,69.085 52.705,66.802 54.737,64.77 84.27,64.77 J4.1
  Bottom Layer w0.5: 51.816,85.09 55.126,81.78 v3(55.126,75.368)
A: 
A1: 
ADC_A0: J1.14 J3.03 J3.04 | length 19.2
  Bottom Layer w0.4: 38.147,75.565 39.335,75.565 40.478,74.422 41.057,74.422 42.541,72.938 43.14,72.938 44.633,71.445 J1.14
  Bottom Layer w0.6: J3.03 33.147,82.042 35.941,79.248 35.941,77.771 38.147,75.565
ADC_A1: J1.18 J3.09 J3.10 | length 14.6
  Layer 1 w0.4: 39.243,73.025 40.513,74.295 41.148,74.295 42.418,75.565 J1.18
  Layer 1 w0.6: J3.09 31.75,74.295 34.925,74.295 36.195,73.025 39.243,73.025
ADC_A2: J1.22 J4.25 R106.2 R137.2 | length 63.2
  Top Layer w0.8: J1.22 45.141,81.153 R106.2 46.227,84.176 R137.2
  Layer 1 w0.6: J1.22 46.609,78.669 46.609,75.323 52.794,69.138 53.263,68.669 53.86,68.072 88.011,68.072 89.911,66.172 J4.25
ADC_A3: J1.26
ADC_A4: J1.30
ADC_A5: J1.34 J4.8 R142.2 | length 57.5
  Top Layer w0.8: R142.2 84.545,87.849 J4.8
  Layer 1 w0.8: J1.34 44.76,100.838 64.262,100.838 74.928,90.172 J4.8
ADC_A6: J1.38
ADC_A7: J1.42
ADC_B0: J1.13
ADC_B1: J1.17
ADC_B2: J1.21
ADC_B3: J1.25
ADC_B4: J1.29
ADC_B5: J1.33
ADC_B6: J1.37
ADC_B7: J1.41
B1: 
CANH: J4.19 R99.2 U13.7 | length 67.8
  Bottom Layer w0.8: v1(54.483,43.561) 52.197,43.561 50.292,45.466 50.292,52.324 82.105,84.138 87.82,84.138 90.868,87.185 J4.19
CANL: J4.31 R99.1 U13.6 | length 79
  Bottom Layer w0.8: v1(55.795,43.521) 55.795,42.587 55.118,41.91 51.816,41.91 48.514,45.212 48.514,52.197 84.328,88.011 86.002,88.011 86.076,88.085 87.66,88.085 87.734,88.011 87.884,88.011 90.045,90.172 J4.31
EQEP1B: C39.2 J4.2 R104.1 U14.14 | length 19.2
  Top Layer w0.4: U14.14 v1(56.429,74.685) v1@56.475,74.731
  Top Layer w1: R104.1 54.394,87.997 54.394,85.128 54.356,85.09 54.356,84.136 ; C39.2 54.506,82.133 54.356,82.283 54.356,84.136 ; 54.611,84.073 54.548,84.136 54.356,84.136
  Bottom Layer w0.4: v1(54.356,85.16) 56.429,83.087 v1(56.429,74.685)
EQEP1I: C87.2 J4.3 R105.1 U14.13 | length 52.5
  Top Layer w0.4: U14.13 57.074,73.223 57.074,71.732 57.043,71.701 v3(57.151,71.592)
  Top Layer w1: R105.1 56.904,88.07 56.904,85.098 56.896,85.09 56.896,82.248 57.046,82.098 C87.2
  Layer 1 w0.8: v3(57.151,71.592) 57.043,71.592 57.043,70.846 57.717,70.172 J4.3
  Bottom Layer w0.4: v1(56.857,85.16) 57.151,84.866 57.151,75.047 57.175,75.023 57.175,74.444 57.151,74.42 v3(57.151,71.592)
GND: C5.2 C22.1 C39.1 C87.1 C91.2 C92.2 C143.2 C144.2 C145.2 C146.N C147.1 C148.1 C149.2 C150.2 D44.A D45.A D47.2 J1.15 J1.16 J1.19 J1.20 J1.23 J1.24 J1.27 J1.28 J1.53 J1.73 J1.93 J3.07 J3.08 J3.19 J3.20 J4.5 J4.12 J4.23 J4.35 LED1.1 Q43.2 R102.1 R131.1 R137.1 R138.1 R139.1 R140.1 R141.1 R142.1 Relay1.4 U12.2 U12.4 U13.2 U14.9 U15.2 U15.4 U16.3 U16.5 U16.6 | length 79.3
  Top Layer w0.4: 59.637,71.701 59.674,71.737 59.674,73.223 U14.9
  Top Layer w0.5: J3.19 J3.19@31.82,61.525 ; 32.408,61.525 32.431,61.502
  Top Layer w0.6: U13.2 54.483,35.62 v2(54.61,35.493)
  Top Layer w1: R102.1 52.269,47.041 52.249,47.061 52.249,48.633 52.523,48.633 v2(52.848,48.308) ; 53.211,78.072 53.167,78.072 52.946,78.293 52.946,78.315 52.066,79.195 C22.1 51.835,79.214 54.527,79.214 C39.1 54.564,79.215 57.113,79.215 C87.1 ; v2(60.579,43.307) C5.2 ; 61.976,99.738 61.976,91.726 75.214,78.487 75.214,77.659 ; 64.037,71.625 64.037,71.698 64.168,71.83 64.168,73.199 C92.2 64.248,73.5 64.262,73.514 64.262,75.022 64.848,75.608 70.371,75.608 71.353,74.626 72.181,74.626
  Bottom Layer w1: v2(52.848,48.308) 52.753,48.403 53.118,48.768 58.039,48.768 60.579,46.228 v2(60.579,43.307) 60.579,38.354 57.718,35.493 v2(54.61,35.493)
GPIO_00: J1.45 J3.01 J3.02 | length 39.5
  Layer 1 w0.5: 37.846,113.538 39.104,113.538 40.501,114.935 41.325,114.935 J1.45
  Layer 1 w0.8: J3.02 J3.01 31.623,107.315 37.846,113.538
GPIO_01: J1.46 J4.18 R140.2 | length 66.9
  Top Layer w0.8: v1(78.462,83.806) 78.378,83.806 R140.2 82.72,82.507 85.09,80.137 87.757,80.137 90.868,83.248 J4.18
  Bottom Layer w0.8: J1.46 47.286,116.205 59.817,103.674 78.462,85.029 v1(78.462,83.806)
GPIO_02: J1.47 J3.05 J3.06 | length 47.4
  Layer 2 w0.5: 37.719,116.332 39.37,116.332 40.513,117.475 J1.47
  Layer 2 w0.8: J3.06 J3.05 35.433,83.312 35.433,114.046 37.719,116.332
GPIO_03: J1.48 J4.30 R141.2 | length 69.1
  Top Layer w0.8: v1(78.462,86.444) 78.203,86.444 R141.2 83.999,85.165 84.963,84.201 88.011,84.201 89.982,86.172 J4.30
  Bottom Layer w0.8: J1.48 47.371,118.745 78.462,87.654 v1(78.462,86.444)
GPIO_04: J1.49 J3.17 J3.18 | length 68.3
  Layer 1 w0.5: 37.935,118.834 38.007,118.906 39.392,118.906 40.501,120.015 J1.49
  Layer 1 w0.8: J3.17 J3.18 29.083,64.311 26.416,66.978 26.416,107.315 37.935,118.834
GPIO_05: J1.50
GPIO_06: J1.51 J4.27 R138.2 | length 104.2
  Top Layer w0.8: R138.2 38.83,48.792 J1.51
  Bottom Layer w0.8: J1.51 38.933,41.204 46.863,33.274 49.403,30.734 72.898,30.734 97.917,55.753 97.917,60.198 97.917,72.39 96.135,74.172 J4.27
GPIO_07: J1.52 J4.28 R107.2 R139.2 | length 144.2
  Top Layer w0.8: R139.2 79.629,79.502 82.931,76.2 88.138,76.2 90.11,78.172 J4.28 ; 78.487,79.502 78.524,79.465 v1(78.791,79.465) ; R107.2 88.713,127.254 v1(90.17,127.254)
  Layer 2 w0.8: J1.52 40.833,48.321 41.529,47.625 45.72,47.625 47.879,49.784 47.879,69.723 58.42,80.264 77.992,80.264 v1(78.791,79.465) ; v1(90.17,127.254) 95.123,122.301 95.123,113.538 99.568,109.093 99.568,79.883 97.857,78.172 J4.28
GPIO_08: J1.55
GPIO_09: D47.1 J1.56 | length 8.4
  Top Layer w0.8: J1.56 42.865,57.277 D47.1
GPIO_10: J1.57
GPIO_11: J1.58
GPIO_12: J1.65
GPIO_13: J1.66
GPIO_14: J1.68
GPIO_15: J1.67
GPIO_16: J1.75
GPIO_17: J1.76
GPIO_18: J1.77
GPIO_19: J1.78
GPIO_20: J1.79 U14.1 | length 40
  Top Layer w0.4: v1(54.102,69.088) 54.348,69.088 54.359,69.077 54.748,69.077 55.106,68.719 55.106,68.614 55.129,68.59 U14.1
  Bottom Layer w0.6: J1.79 38.735,94.615 37.211,93.091 37.211,86.614 39.751,84.074 46.228,84.074 46.698,83.604 46.698,75.73 53.213,69.215 53.34,69.088 v1(54.102,69.088)
GPIO_21: J1.80 U14.3 | length 36.6
  Top Layer w0.4: v1(55.806,68.904) 55.806,68.781 55.914,68.673 56.12,68.673 56.384,68.409 56.384,68.203 56.384,67.533 U14.3
  Bottom Layer w0.4: J1.80 40.833,95.005 42.62,93.218 43.18,93.218 44.45,91.948 45.466,91.948
  Bottom Layer w0.6: 45.466,91.948 47.498,89.916 47.498,76.061 53.474,70.085 54.629,70.085 55.718,68.996 55.806,68.996 v1(55.806,68.904)
GPIO_22: J1.81
GPIO_23: J1.82 U14.4 | length 38.6
  Top Layer w0.4: v1(56.642,69.342) 56.758,69.342 57.079,69.021 U14.4
  Bottom Layer w0.4: J1.82 40.833,97.47 42.418,95.885 43.071,95.885 44.552,94.404 45.353,94.404 45.692,94.065 46.031,93.726 46.101,93.726
  Bottom Layer w0.6: 46.101,93.726 46.101,92.444 48.298,90.247 48.298,77.686 v1(56.642,69.342)
GPIO_24: J1.69
GPIO_25: J1.70
GPIO_26: J1.71
GPIO_27: J1.72
GPIO_30: J1.87 R101.1 | length 95.2
  Top Layer w0.6: v1(55.88,32.258) R101.1 R101.1
  Layer 2 w0.6: J1.87 37.719,104.775 37.122,104.178 36.576,103.632 36.576,83.182 36.576,36.068 41.91,30.734 55.576,30.734 55.88,31.038 55.88,32.247 v1(55.88,32.258)
GPIO_31: J1.88 R100.1 | length 88.3
  Top Layer w0.5: v1(50.546,32.131) v1(50.546,32.131) R100.1
  Layer 2 w0.5: 37.719,103.124 38.197,103.602 39.328,103.602 40.833,105.107 J1.88
  Layer 2 w0.6: 37.719,103.124 37.465,102.87 37.465,36.703 42.037,32.131 v1(50.546,32.131)
GPIO_32: J1.89
GPIO_33: J1.90
GPIO_34: J1.91
GPIO_40: J1.59
GPIO_41: J1.60
GPIO_42: J1.61
GPIO_43: J1.62
GPIO_44: J1.36
GPIO_50: J1.63
GPIO_51: J1.83
GPIO_54: J1.39
GPIO_55: J1.40
GPIO_56: J1.43
GPIO_57: J1.44
GPIO_58: J1.35
NetC1_1: 
NetC2_1: 
NetC3_1: 
NetC4_1: 
NetC6_1: 
NetC7_1: 
NetC8_1: 
NetC8_2: 
NetC9_1: 
NetC9_2: 
NetC10_1: 
NetC11_1: 
NetC12_1: 
NetC13_1: 
NetC14_1: 
NetC15_1: 
NetC16_1: 
NetC17_1: 
NetC18_1: 
NetC19_1: 
NetC20_1: 
NetC21_1: 
NetC23_1: 
NetC23_2: 
NetC24_1: 
NetC25_1: 
NetC26_1: 
NetC27_1: 
NetC28_1: 
NetC29_1: 
NetC30_1: 
NetC33_1: 
NetC34_1: 
NetC35_1: 
NetC36_1: 
NetC37_1: 
NetC38_1: 
NetC42_1: 
NetC43_1: 
NetC44_1: 
NetC45_1: 
NetC46_1: 
NetC47_1: 
NetC50_1: 
NetC51_1: 
NetC70_2: 
NetC71_2: 
NetC72_2: 
NetC73_2: 
NetC74_2: 
NetC75_1: 
NetC76_1: 
NetC77_1: 
NetC78_1: 
NetC79_1: 
NetC80_1: 
NetC81_1: 
NetC82_1: 
NetC83_1: 
NetC84_1: 
NetC85_1: 
NetC86_1: 
NetC93_2: 
NetC94_2: 
NetC95_2: 
NetC96_2: 
NetC97_2: 
NetC98_2: 
NetC99_2: 
NetC100_2: 
NetC101_2: 
NetC102_2: 
NetC103_2: 
NetC104_2: 
NetC105_2: 
NetC106_2: 
NetC107_2: 
NetC108_2: 
NetC109_2: 
NetC110_2: 
NetC111_2: 
NetC112_2: 
NetC113_2: 
NetC114_2: 
NetC115_2: 
NetC116_2: 
NetC117_2: 
NetC118_2: 
NetC119_2: 
NetC120_2: 
NetC121_2: 
NetC122_2: 
NetC123_2: 
NetC124_2: 
NetC125_2: 
NetC126_2: 
NetC127_2: 
NetC128_2: 
NetC129_2: 
NetC130_2: 
NetC131_2: 
NetC143_1: C143.1 D43.C U16.1
NetC144_1: C144.1 D43.A D44.C R130.1 R136.1
NetC146_P: C146.P L1.2 L2.1 R132.2
NetD1_1: 
NetD1_2: 
NetD2_1: 
NetD3_1: 
NetD4_1: 
NetD5_1: 
NetD6_1: 
NetD7_1: 
NetD8_2: 
NetD10_1: 
NetD11_1: 
NetD12_1: 
NetD13_1: 
NetD14_1: 
NetD15_1: 
NetD15_2: 
NetD16_1: 
NetD17_1: 
NetD18_1: 
NetD19_1: 
NetD20_1: 
NetD21_1: 
NetD22_2: 
NetD24_1: 
NetD25_1: 
NetD26_1: 
NetD27_1: 
NetD28_1: 
NetD29_1: 
NetD29_2: 
NetD30_1: 
NetD31_1: 
NetD32_1: 
NetD33_1: 
NetD34_1: 
NetD35_1: 
NetD36_1: 
NetD36_2: 
NetD37_1: 
NetD38_1: 
NetD39_1: 
NetD40_1: 
NetD41_1: 
NetD42_1: 
NetD45_C: D45.C L1.1 U16.2
NetD46_1: D46.1 Q43.3 Relay1.2 | length 5.3
  Top Layer w0.6: Relay1.2 69.92,134.747 Q43.3 D46.1
NetLED1_2: IC1.2 LED1.2 | length 2.8
  Top Layer w0.8: IC1.2 82.931,129.794 LED1.2
NetQ43_1: Q43.1 R108.1 | length 2.2
  Top Layer w0.6: Q43.1 75.499,133.797 75.692,133.604 R108.1
NetR94_1: 
NetR95_1: 
NetR98_1: R98.1 U13.5
NetR100_2: R100.2 U13.1
NetR101_2: R101.2 U13.4
NetR102_2: R102.2 U13.8
NetR107_1: IC1.1 R107.1 | length 2.8
  Top Layer w0.8: IC1.1 82.839,127.346 R107.1
NetR108_2: IC1.3 R108.2 | length 6.9
  Top Layer w0.8: IC1.3 77.597,129.921 79.605,131.929 R108.2
NetR109_1: R109.1 U14.8 | length 3.2
  Top Layer w0.4: R109.1 59.679,65.458 U14.8
NetR114_1: 
NetR115_1: 
NetR116_1: 
NetR118_1: 
NetR119_1: 
NetR120_1: 
NetR122_1: 
NetR123_1: 
NetR124_1: 
NetR131_2: R131.2 R132.1 U16.4 | length 21.2
  Top Layer w0.6: R131.2 R131.2@7.425,85.403 ; v2@7.425,83.888 v2(7.493,83.82)
  Top Layer w0.8: R131.2 7.457,85.571 R132.1 ; v2@7.425,83.888 R131.2@7.425,85.403 ; v2(14.15,72.592) 14.226,72.515 16.688,72.515 U16.4
  Bottom Layer w0.8: v2(7.493,83.82) 7.493,78.74 12.315,73.918 13.641,72.592 v2(14.15,72.592)
NetU1_2: 
NetU2_2: 
NetU3_5: 
NetU4_5: 
NetU7_2: 
NetU8_5: 
pin1: J4.16 Relay1.3 | length 87.6
  Layer 2 w0.8: Relay1.3 81.153,112.014 93.853,112.014 98.287,107.58 98.287,81.777 96.647,80.137 93.853,80.137 90.868,77.152 J4.16
PWR: C92.1 C148.2 C149.1 D46.2 IC1.4 J1.54 J1.64 J1.74 J1.84 J1.92 J3.13 J3.14 J4.4 J4.11 J4.22 J4.34 R103.2 R104.2 R105.2 Relay1.1 U12.3 U14.15 U15.1 | length 8.8
  Top Layer w0.4: U14.15 55.779,72.282 55.788,72.272 55.788,71.873 v3(56.018,71.873)
  Top Layer w0.6: R104.2 54.431,91.492 54.468,91.529 v2(54.468,91.724) ; v1(61.372,74.204) 61.372,74.068 61.216,73.912 61.849,73.279 C92.1 ; D46.2 74.24,128.325 IC1.4
  other v1: 20,124 21,124 22,124 23,124 24,124 14.5,125 15.5,125 16.5,125 17.5,125 18.5,125 19.5,125 20.5,125 21.5,125 22.5,125 23.5,125 14,126 15,126 16,126 17,126 18,126 19,126 20,126 21,126 22,126 23,126 24,126 14.5,127 15.5,127 16.5,127 17.5,127 18.5,127 19.5,127 20.5,127 21.5,127 22.5,127 23.5,127 14,128 15,128 16,128 17,128 18,128 19,128 20,128 21,128 22,128 23,128 24,128 25,128 14.5,129 15.5,129 16.5,129 17.5,129 18.5,129 19.5,129 20.5,129 21.5,129 22.5,129 23.5,129 18,130 19,130 20,130 21,130 22,130 23,130
RX_GPIO_28: J1.85
Source_3: 
TX_GPIO_29: J1.86
VREFHI-ext: J1.32
VREFLO-ext: J1.31
pads on no net: J1. J1.1 J1.2 J1.3 J1.4 J1.5 J1.6 J1.7 J1.8 J1.9 J1.10 J1.11 J1.12 J1.94 J1.95 J1.96 J1.97 J1.98 J1.99 J1.100 J3.15 J3.16 J4. J4.7 J4.9 J4.13 J4.14 J4.15 J4.20 J4.24 J4.26 J4.32 U14.5 U14.6 U14.7 U14.10 U14.11 U14.12
copper on no net: | length 0
  Top Layer w0.4: 58.374,73.223 58.379,73.228 58.384,73.233 ; 59.029,73.228 59.034,73.233

## Polygon pours and split planes (outlines as drawn)
+48V on Top Layer "+48V_L01_P024" (solid, pour order 24): 24.13,36.068 26.289,36.068 26.289,27.813 20.574,27.813 20.574,36.068
+3V3 on Top Layer "+3V3_L01_P027" (solid, pour order 27): 13.081,134.62 23.622,134.62 23.622,137.16 23.495,137.16 13.081,137.16
GND on Top Layer "GND_L01_P018" (solid, pour order 18): 23.876,119.38 23.876,117.729 28.067,117.729 28.067,75.915 35.687,75.915 35.687,25.4 113.03,25.4 113.03,143.637 25.064,143.637 25.064,133.477 21.717,133.477 21.717,132.08 25.064,132.08 28.067,129.077 28.067,122.428 12.319,122.428 8.763,126.492 0,126.492 0,91.948 3.302,91.948 3.302,92.964 5.207,94.869 5.207,98.54 2.413,101.854 2.413,107.696 5.842,107.696 5.842,110.744 11.43,110.744 11.557,110.871 11.557,112.522 11.445,119.38
PWR on Top Layer "PWR_L01_P026" (solid, pour order 26): 58.928,99.822 58.991,99.885 60.008,99.885 60.008,106.108 60.008,106.934 50.8,106.934 50.8,104.648 58.928,104.648
GND on Top Layer "GND_L01_P019" (solid, pour order 19): 12.928,73.787 18.669,73.724 18.669,74.734 11.729,74.734 10.414,76.2 6.858,76.2 4.826,78.232 4.826,83.312 6.223,84.709 6.223,86.36 4.572,86.36 3.302,87.63 3.302,92.964 5.207,94.869 5.207,96.012 0,96.012 0,58.983 6.35,58.983 6.35,61.087 6.35,65.278 12.928,65.278 12.928,70.104 18.669,70.104 18.669,71.247 12.928,71.247
NetC144_1 on Top Layer "NETC144_1_L01_P022" (solid, pour order 22): 15.24,36.195 17.78,36.195 17.78,27.822 8.342,27.822 8.196,47.244 12.065,47.244 15.24,44.069 15.24,37.338
GND on Top Layer "GND_L01_P021" (solid, pour order 21): 6.35,25.4 32.766,25.4 32.766,62.611 27.813,62.611 27.813,27.305 6.35,27.305 6.35,60.071 0,60.071 0,25.4
GND on Top Layer "GND_L01_P020" (solid, pour order 20): 0,126.365 8.763,126.365 8.763,127.968 13.208,132.08 22.225,132.08 22.225,133.477 17.272,133.477 13.208,133.477 8.255,138.43 0,138.43
PWR on Top Layer "PWR_L01_P017" (solid, pour order 17): 13.208,130.81 13.223,130.825 22.972,130.825 26.67,127.127 26.67,122.785 13.16,122.785
NetD45_C on Top Layer "NETD45_C_L01_P016" (solid, pour order 16): 22.606,68.453 14.986,68.453 14.986,69.469 14.986,69.596 19.05,69.596 19.05,76.2 11.176,76.2 9.398,78.232 9.398,86.36 22.606,86.36
+3V3 on Top Layer "+3V3_L01_P015" (solid, pour order 15): 57.658,47.498 61.468,47.498 61.468,46.228 57.658,46.228
CANH on Top Layer "CANH_L01_P014" (solid, pour order 14): 53.721,51.435 55.499,51.435 55.499,49.784 54.864,49.149 54.864,41.529 54.102,41.529 54.102,44.45 53.721,44.831
CANL on Top Layer "CANL_L01_P013" (solid, pour order 13): 55.626,46.482 56.515,49.784 56.515,51.502 58.039,51.502 58.039,49.987 56.769,46.304 56.769,44.831 56.134,44.196 56.134,41.529 55.372,41.529 55.372,44.577 55.626,44.831
NetR98_1 on Top Layer "NETR98_1_L01_P012" (solid, pour order 12): 57.658,45.593 57.658,44.45 56.642,43.688 56.642,41.529 57.404,41.529 57.404,43.18 59.182,44.45 59.182,45.593
NetR102_2 on Top Layer "NETR102_2_L01_P011" (solid, pour order 11): 51.546,45.807 51.577,45.776 53.118,45.776 53.118,44.609 53.594,44.064 53.594,41.529 52.757,41.529 52.738,41.548 52.738,43.274 51.538,44.474
NetR101_2 on Top Layer "NETR101_2_L01_P010" (solid, pour order 10): 56.642,38.735 56.642,34.671 58.928,34.671 58.928,38.735
NetR100_2 on Top Layer "NETR100_2_L01_P009" (solid, pour order 9): 51.562,34.671 53.721,34.671 53.721,38.735 51.562,38.735
15V on Top Layer "15V_L01_P005" (solid, pour order 5): 19.558,112.014 24.511,112.014 25.781,110.744 25.781,74.295 27.305,72.771 32.385,72.771 32.385,71.12 23.622,71.12 23.622,103.124 21.717,105.029 19.558,105.029 8.997,105.029 6.457,102.489 3.409,102.489 3.409,106.172 6.076,106.172 9.886,109.982 12.172,109.982 12.172,112.649 12.172,118.999 19.558,118.999
NetC146_P on Top Layer "NETC146_P_L01_P002" (solid, pour order 2): 22.606,104.14 9.398,104.14 9.398,96.667 4.8,92.069 4.8,87.134 4.933,87.122 6.076,87.122 6.076,89.408 9.144,89.408 9.144,87.122 22.606,87.122
NetC143_1 on Top Layer "NETC143_1_L01_P001" (solid, pour order 1): 11.664,51.435 18.923,51.435 18.923,68.072 14.986,68.072 14.986,66.802 12.192,64.008 8.108,64.008 8.108,60.96 8.108,51.435
+48V on Bottom Layer "+48V_L04_P028" (solid, pour order 28): 85.223,99.695 87.63,99.695 89.662,97.663 92.202,97.663 94.234,99.695 107.696,99.695 107.696,33.274 100.584,26.162 23.368,26.162 23.368,36.195 41.656,36.195 48.387,29.464 93.726,29.464 101.884,37.622 101.884,96.647 93.726,96.647 91.694,94.615 89.916,94.615 87.884,96.647 85.078,96.647
+3V3 on Layer 2 "+3V3_L03_P030" (solid, pour order 30): 88.265,83.566 90.043,81.788 92.075,81.788 93.853,83.566 96.393,83.566 96.393,81.153 96.139,80.899 93.472,80.899 91.44,78.867 90.17,78.867 88.138,80.899 85.725,80.899 85.725,83.566
PWR on Layer 1 "PWR_L02_P031" (solid, pour order 31): 35.56,68.58 35.56,51.054 45.339,51.054 45.339,68.58 49.11,71.247 88.519,71.247 88.519,76.2 64.008,76.2 64.008,83.82 58.674,89.154 58.674,92.583 46.99,92.583 46.99,98.298 46.863,98.425 97.663,98.425 97.663,103.759 46.99,103.759 46.99,125.866 58.674,125.866 76.327,126.097 76.327,128.397 73.279,128.397 70.612,131.064 23.212,131.064 13.462,131.064 13.208,130.81 13.16,122.785 35.56,122.785 35.56,70.079 27.813,70.149 27.813,68.58

## Other copper
Top Layer:
  rectangle net PWR: 51.054,89.281 57.658,90.424
  rectangle net +3V3: 55.372,60.833 56.642,65.405
Layer 1:
  rectangle net ADC_A1: 28.282,73.485 32.497,75.228
Bottom Layer:
  rectangle net ADC_A0: 28.233,81.153 32.385,82.918